# EAGLE board CT_schematic (EAGLE 7.6.0)

Size 100 x 80 mm. Coordinates in mm from the lower left corner, seen from the top.
Outline: 0,0 100,0 100,80 0,80 0,0
Copper layers (1*16): Top 0.035mm / dielectric 1.5mm / Bottom 0.035mm
Design rules "default": minimum track width 10mil, minimum drill 24mil, track to track 8mil, track to pad 8mil, pad to pad 8mil, via to via 8mil, smd to smd 8mil, copper to edge 40mil, drill to drill 8mil, minimum pad ring 10mil, minimum via ring 8mil, stop-mask expansion 4mil, vias tented up to drill 0mil, thermal gap 10mil

## Footprints (pad centres in the part's own frame; a part is rotated, then mirrored left to right if it is on the bottom)
C0603 = smd 0.8 x 0.8: 1 -0.762,0; 2 0.762,0
C0402 = smd 0.5 x 0.5: 1 -0.508,0; 2 0.508,0
C1210 = smd 1.2 x 2.5: 1 -1.524,0; 2 1.524,0
C1206 = smd 1.3 x 1.6: 1 -1.524,0; 2 1.524,0
L0603 = smd 0.8 x 0.8: 1 -0.762,0; 2 0.762,0
R0603 = smd 0.8 x 0.8: 1 -0.762,0; 2 0.762,0
LQFP32 = smd 0.54 x 0.85: 1 -2.8,-4.275; 2 -2,-4.275; 3 -1.2,-4.275; 4 -0.4,-4.275; 5 0.4,-4.275; 6 1.19,-4.275; 7 1.99,-4.275; 8 2.79,-4.275; 17 2.8,4.275; 18 2,4.275; 19 1.2,4.275; 20 0.4,4.275; 21 -0.4,4.275; 22 -1.2,4.275; 23 -2,4.275; 24 -2.8,4.275 | smd 0.85 x 0.54: 9 4.275,-2.8; 10 4.275,-2; 11 4.275,-1.2; 12 4.275,-0.4; 13 4.275,0.4; 14 4.275,1.2; 15 4.275,2; 16 4.275,2.8; 25 -4.275,2.8; 26 -4.275,2; 27 -4.275,1.2; 28 -4.275,0.4; 29 -4.275,-0.4; 30 -4.275,-1.2; 31 -4.275,-2; 32 -4.275,-2.8
TST-110-05-T-D-RA = drill 1 pad 1.7 square: 1 0,0 | drill 1 pad 1.7: 2 0,2.54; 3 2.54,0; 4 2.54,2.54; 5 5.08,0; 6 5.08,2.54; 7 7.62,0; 8 7.62,2.54; 9 10.16,0; 10 10.16,2.54; 11 12.7,0; 12 12.7,2.54; 13 15.24,0; 14 15.24,2.54; 15 17.78,0; 16 17.78,2.54; 17 20.32,0; 18 20.32,2.54; 19 22.86,0; 20 22.86,2.54
MBH7BLZ02-109004 = smd 0.5 x 0.5: 1 0,0; 15 9.85,0; 27 9.85,8.45; 41 0,8.45 | smd 0.45 x 0.5: 2 0.725,0; 3 1.425,0; 4 2.125,0; 5 2.825,0; 6 3.525,0; 7 4.225,0; 8 4.925,0; 9 5.625,0; 10 6.325,0; 11 7.025,0; 12 7.725,0; 13 8.425,0; 14 9.125,0 | smd 0.5 x 0.45: 16 9.85,0.725; 17 9.85,1.425; 18 9.85,2.125; 19 9.85,2.825; 20 9.85,3.525; 21 9.85,4.225; 22 9.85,4.925; 23 9.85,5.625; 24 9.85,6.325; 25 9.85,7.025; 26 9.85,7.725; 28 9.15,8.45; 29 8.45,8.45; 30 7.75,8.45; 31 7.05,8.45; 32 6.35,8.45; 33 5.65,8.45; 34 4.95,8.45; 35 4.25,8.45; 36 3.55,8.45; 37 2.85,8.45; 38 2.15,8.45; 39 1.45,8.45; 40 0.75,8.45; 42 0,7.75; 43 0,7.05; 44 0,6.35; 45 0,5.65; 46 0,4.95; 47 0,4.25; 48 0,3.55; 49 0,2.85; 50 0,2.15; 51 0,1.45; 52 0,0.75 | smd 3 x 2.5: 53 3.225,2.775; 54 6.625,2.775; 55 6.625,5.675; 56 3.225,5.675
TSSOP20-I = smd 0.4 x 1.35: 1 -2.925,-2.875; 2 -2.275,-2.875; 3 -1.625,-2.875; 4 -0.975,-2.875; 5 -0.325,-2.875; 6 0.325,-2.875; 7 0.975,-2.875; 8 1.625,-2.875; 9 2.275,-2.875; 10 2.925,-2.875; 11 2.925,2.875; 12 2.275,2.875; 13 1.625,2.875; 14 0.975,2.875; 15 0.325,2.875; 16 -0.325,2.875; 17 -0.975,2.875; 18 -1.625,2.875; 19 -2.275,2.875; 20 -2.925,2.875
HTSS-105-01-G-D = drill 1 pad 1.8 square: 1 0,0 | drill 1 pad 1.8: 2 0,2.54; 3 2.54,0; 4 2.54,2.54; 5 5.08,0; 6 5.08,2.54; 7 7.62,0; 8 7.62,2.54; 9 10.16,0; 10 10.16,2.54
ABS07-32.768KHZ-7-T = smd 1.1 x 2.4: 1 -2.5,0; 2 0,0
ASFL1 = smd 1.7 x 1.5: 1 -1.27,-1.1; 2 1.27,-1.1; 3 1.27,1.1; 4 -1.27,1.1
SOIC-8_EP = smd 1.6 x 0.533: 1 -2.921,1.905; 2 -2.921,0.635; 3 -2.921,-0.635; 4 -2.921,-1.905; 5 2.921,-1.905; 6 2.921,-0.635; 7 2.921,0.635; 8 2.921,1.905 | smd 2.54 x 3.302: EPAD 0,0 | drill 0.406 pad 0.406: P$1 -0.508,0.635; P$2 0.381,0.635; P$3 -0.508,-0.635; P$4 0.381,-0.635
DFN8_2X3MC = smd 0.813 x 0.305: 1 -1.398,0.75; 2 -1.398,0.25; 3 -1.398,-0.25; 4 -1.398,-0.75; 5 1.398,-0.75; 6 1.398,-0.25; 7 1.398,0.25; 8 1.398,0.75 | smd 1.753 x 1.549: 9 0,0
JST-2-SMD = smd 1 x 4.6: 1 -1,-3.7; 2 1,-3.7 | smd 1.6 x 3.4: NC1 -3.4,1.5; NC2 3.4,1.5
FCI_10118193-0001LF = smd 0.4 x 1.35: 1 -1.3,2.675; 2 -0.65,2.675; 3 0,2.675; 4 0.65,2.675; 5 1.3,2.675 | smd 1.6 x 1.4: 6 -3.2,2.45; 7 3.2,2.45 | smd 1.9 x 1.9: 8 -1.2,0; 9 1.2,0 | hole 0.5: -3.3,0; 3.3,0
SON-6 = smd 0.55 x 0.3: 1 -0.355,0.5 | smd 0.52 x 0.3: 2 -0.37,0; 3 -0.37,-0.5; 4 0.37,-0.5; 5 0.37,0; 6 0.37,0.5
SW_4-1437565-2 = smd 1.4 x 2.1: 1 -2.23,4.55; 2 -2.23,-4.55; 3 2.23,4.55; 4 2.23,-4.55
LGM67K-G1J2-24-Z = smd 0.8 x 1.4: A -2,0; C 0,0
NC7SZ125M5X = smd 1.3 x 0.7: 1 -1.3,0.95; 2 -1.3,0; 3 -1.3,-0.95; 4 1.3,-0.95; 5 1.3,0.95

## Placement (x,y rotation side)
C1  1e-07  [C0603]  -38.1,59.69 0 top  (outside the outline)
C2  1e-07  [C0603]  -41.91,59.69 0 top  (outside the outline)
C3  1e-07  [C0603]  -45.72,59.69 0 top  (outside the outline)
C4  1e-07  [C0603]  -49.53,59.69 0 top  (outside the outline)
C5  4.7e-06  [C0603]  -34.29,59.69 0 top  (outside the outline)
C6  1e-08  [C0603]  -53.34,59.69 0 top  (outside the outline)
C7  1e-06  [C0603]  -57.15,59.69 0 top  (outside the outline)
C8  1e-11  [C0402]  -38.1,64.77 0 top  (outside the outline)
C9  1e-11  [C0402]  -41.91,64.77 0 top  (outside the outline)
C10  1e-07  [C0402]  -45.72,64.77 0 top  (outside the outline)
C11  1e-07  [C0402]  -49.53,64.77 0 top  (outside the outline)
C12  1e-07  [C0402]  -53.34,64.77 0 top  (outside the outline)
C13  1e-07  [C0402]  -57.15,64.77 0 top  (outside the outline)
C14  1e-07  [C0402]  -60.96,64.77 0 top  (outside the outline)
C15  1e-07  [C0402]  -64.77,64.77 0 top  (outside the outline)
C16  1e-07  [C0402]  -68.58,64.77 0 top  (outside the outline)
C17  1e-07  [C0402]  -15.24,69.85 0 top  (outside the outline)
C18  1e-07  [C0402]  -19.05,69.85 0 top  (outside the outline)
C19  1e-08  [C0402]  -22.86,69.85 0 top  (outside the outline)
C20  1e-05  [C1210]  -38.1,46.99 0 top  (outside the outline)
C21  1e-05  [C1210]  -44.45,46.99 0 top  (outside the outline)
C22  1e-05  [C1210]  -50.8,46.99 0 top  (outside the outline)
C23  1e-05  [C1210]  -57.15,46.99 0 top  (outside the outline)
C24  1e-07  [C0402]  -26.67,69.85 0 top  (outside the outline)
C25  1e-05  [C1206]  -63.5,46.99 0 top  (outside the outline)
C26  1e-05  [C1206]  -16.51,54.61 0 top  (outside the outline)
C27  1e-08  [C0402]  -30.48,69.85 0 top  (outside the outline)
C28  1e-08  [C0402]  -34.29,69.85 0 top  (outside the outline)
C29  1e-08  [C0402]  -38.1,69.85 0 top  (outside the outline)
F1  240.0  [L0603]  -60.96,59.69 0 top  (outside the outline)
R1  10000.0  [R0603]  -59.69,54.61 0 top  (outside the outline)
R2  1000.0  [R0603]  -64.77,59.69 0 top  (outside the outline)
R3  1600.5  [R0603]  -15.24,64.77 0 top  (outside the outline)
R4  4700.0  [R0603]  -19.05,64.77 0 top  (outside the outline)
R5  4700.0  [R0603]  -22.86,64.77 0 top  (outside the outline)
R6  10000.0  [R0603]  -64.77,54.61 0 top  (outside the outline)
R7  10000.0  [R0603]  -15.24,59.69 0 top  (outside the outline)
R8  4031.5447154472  [R0603]  -44.45,54.61 0 top  (outside the outline)
R9  2200.0  [R0603]  -26.67,64.77 0 top  (outside the outline)
R10  10000.0  [R0603]  -20.32,59.69 0 top  (outside the outline)
R11  10000.0  [R0603]  -25.4,59.69 0 top  (outside the outline)
R12  9100.0  [R0603]  -30.48,64.77 0 top  (outside the outline)
R13  680000.0  [R0603]  -49.53,54.61 0 top  (outside the outline)
R14  120000.0  [R0603]  -54.61,54.61 0 top  (outside the outline)
R15  2000.0  [R0603]  -34.29,64.77 0 top  (outside the outline)
R16  10000.0  [R0603]  -30.48,59.69 0 top  (outside the outline)
U1  STM32L041K6T7  [LQFP32]  -24.13,7.62 0 top  (outside the outline)
U2  TST-110-05-T-D-RA  [TST-110-05-T-D-RA]  -46.99,38.1 0 top  (outside the outline)
U3  MBH7BLZ02-109004  [MBH7BLZ02-109004]  -52.07,1.27 0 top  (outside the outline)
U4  SP3203ECY-L/TR  [TSSOP20-I]  -43.18,20.32 0 top  (outside the outline)
U5  HTSS-105-01-G-D  [HTSS-105-01-G-D]  -27.94,30.48 0 top  (outside the outline)
U6  ABS07-32.768KHZ-7-T  [ABS07-32.768KHZ-7-T]  -64.77,40.64 0 top  (outside the outline)
U7  ASFL1-12MHZ-NCS  [ASFL1]  -44.45,30.48 0 top  (outside the outline)
U8  MIC5234YME  [SOIC-8_EP]  -17.78,46.99 0 top  (outside the outline)
U9  MCP73831T-2ACI/MC  [DFN8_2X3MC]  -46.99,68.58 0 top  (outside the outline)
U10  S2B-PH-SM4-TB(LF)(SN)  [JST-2-SMD]  -57.15,21.59 0 top  (outside the outline)
U11  10118193-0001LF  [FCI_10118193-0001LF]  -53.34,30.48 0 top  (outside the outline)
U12  TPS3895ADRYR  [SON-6]  -40.64,68.58 0 top  (outside the outline)
U13  4-1437565-2  [SW_4-1437565-2]  -27.94,20.32 0 top  (outside the outline)
U14  Q65110A2395  [LGM67K-G1J2-24-Z]  -26.67,48.26 0 top  (outside the outline)
U15  nc7sz125m5x  [NC7SZ125M5X]  -21.59,53.34 0 top  (outside the outline)
U16  nc7sz125m5x  [NC7SZ125M5X]  -27.94,53.34 0 top  (outside the outline)
U17  nc7sz125m5x  [NC7SZ125M5X]  -34.29,53.34 0 top  (outside the outline)

## Library data of the parts
C1-C29 F1 R1-R16 U1-U17 = circuit_tree

## Nets
CLK_CRYSTAL_U1_2: C8.1 U1.2 U6.1
CLK_CRYSTAL_U1_3: C9.1 U1.3 U6.2
CLK_U1_6: U1.6 U7.3
GND: C1.2 C2.2 C3.2 C4.2 C5.2 C6.2 C7.2 C8.2 C9.2 C10.2 C11.2 C12.2 C13.2 C14.2 C17.2 C18.2 C19.2 C20.2 C21.2 C22.2 C23.2 C24.2 C25.2 C26.2 C27.2 C28.2 C29.2 R2.2 R6.2 R9.2 R12.2 R14.2 R15.2 U1.16 U1.32 U2.4 U2.6 U2.8 U2.10 U2.12 U2.14 U2.16 U2.18 U2.20 U3.1 U3.3 U3.15 U3.27 U3.29 U3.41 U3.42 U3.43 U3.44 U3.45 U3.46 U3.47 U3.48 U3.49 U3.50 U3.52 U3.53 U3.54 U3.55 U3.56 U4.18 U5.9 U7.2 U8.7 U8.EPAD U9.6 U9.9 U10.2 U11.5 U11.6 U11.7 U11.8 U11.9 U12.2 U14.C U15.2 U15.3 U16.1 U16.3 U17.1 U17.3
INPUT_USBPOWER_5V: C25.1 R16.2 U9.1 U9.2 U11.1
NET_U1_4: R5.1 U1.4 U17.4
NET_U1_5: C6.1 C7.1 F1.1 U1.5
NET_U1_29: R3.1 U1.29 U14.A
NET_U1_30: R1.1 U1.30 U13.3 U13.4
NET_U1_31: R6.1 U1.31
NET_U3_39: R4.1 U3.39 U16.4
NET_U4_1: C15.1 U4.1
NET_U4_2: C17.1 U4.2
NET_U4_3: C15.2 U4.3
NET_U4_4: C16.1 U4.4
NET_U4_5: C16.2 U4.5
NET_U4_6: C18.1 U4.6
NET_U4_20: U4.20
NET_U5_3: U4.14 U5.3
NET_U5_4: U4.13 U5.4
NET_U5_5: U4.17 U5.5
NET_U5_6: U4.16 U5.6
NET_U8_4: R8.2 R9.1 U8.4
NET_U9_5: R16.1 U9.5
NET_U9_8: R15.1 U9.8
NET_U12_1: R11.1 R12.1 U12.1
NET_U12_3: R13.2 R14.1 U12.3
NET_U12_4: R10.1 U12.4 U15.4 U16.2 U17.2
NET_U13_1: R2.1 U13.1 U13.2
PROC_LPUART1_CTS: U1.12 U3.26
PROC_LPUART1_RTS: U1.15 U3.24
PROC_LPUART1_RX: U1.9 U3.25
PROC_LPUART1_TX: U1.8 U3.23
PROC_SYS_SWCLK: U1.24 U2.9
PROC_SYS_SWDIO: U1.23 U2.7
PROC_USART2_CTS: U1.13 U4.8
PROC_USART2_RTS: U1.7 U4.10
PROC_USART2_RX: U1.20 U4.11
PROC_USART2_TX: U1.19 U4.7
RST_OUT_U2_SRESET_B: R7.1 U2.15 U15.1
VCC_S1_3V7: C20.1 C21.1 C26.1 U8.5 U8.8 U9.3 U9.4 U10.1
VCC_TIER1_3V3: C1.1 C2.1 C3.1 C4.1 C5.1 C10.1 C11.1 C12.1 C13.1 C14.1 C19.1 C22.1 C23.1 C24.1 C27.1 C28.1 C29.1 F1.2 R1.2 R3.2 R4.2 R5.2 R7.2 R8.1 R10.2 R11.2 R13.1 U1.1 U1.17 U2.1 U3.28 U4.12 U4.19 U7.4 U8.1 U12.6 U15.5 U16.5 U17.5

## Tracks (layer width: path | path; a pad name or v marks a point on that pad's centre or on a via)
CLK_CRYSTAL_U1_2  (2 unrouted)
CLK_CRYSTAL_U1_3  (2 unrouted)
CLK_U1_6  (1 unrouted)
GND  (84 unrouted)
INPUT_USBPOWER_5V  (4 unrouted)
NET_U1_4  (2 unrouted)
NET_U1_5  (3 unrouted)
NET_U1_29  (2 unrouted)
NET_U1_30  (3 unrouted)
NET_U1_31  (1 unrouted)
NET_U3_39  (2 unrouted)
NET_U4_1  (1 unrouted)
NET_U4_2  (1 unrouted)
NET_U4_3  (1 unrouted)
NET_U4_4  (1 unrouted)
NET_U4_5  (1 unrouted)
NET_U4_6  (1 unrouted)
NET_U5_3  (1 unrouted)
NET_U5_4  (1 unrouted)
NET_U5_5  (1 unrouted)
NET_U5_6  (1 unrouted)
NET_U8_4  (2 unrouted)
NET_U9_5  (1 unrouted)
NET_U9_8  (1 unrouted)
NET_U12_1  (2 unrouted)
NET_U12_3  (2 unrouted)
NET_U12_4  (4 unrouted)
NET_U13_1  (2 unrouted)
PROC_LPUART1_CTS  (1 unrouted)
PROC_LPUART1_RTS  (1 unrouted)
PROC_LPUART1_RX  (1 unrouted)
PROC_LPUART1_TX  (1 unrouted)
PROC_SYS_SWCLK  (1 unrouted)
PROC_SYS_SWDIO  (1 unrouted)
PROC_USART2_CTS  (1 unrouted)
PROC_USART2_RTS  (1 unrouted)
PROC_USART2_RX  (1 unrouted)
PROC_USART2_TX  (1 unrouted)
RST_OUT_U2_SRESET_B  (2 unrouted)
VCC_S1_3V7  (7 unrouted)
VCC_TIER1_3V3  (38 unrouted)